# Altium PCB PWR_supply_sch.PcbDoc
Units mil, origin at the board's own origin, x right, y up, seen from the top; angles counter-clockwise.
Board outline 1895 x 1825 mil, 2 copper layers (Top Layer, Bottom Layer); 18 components, 8 nets, 40 pads, 4 vias.
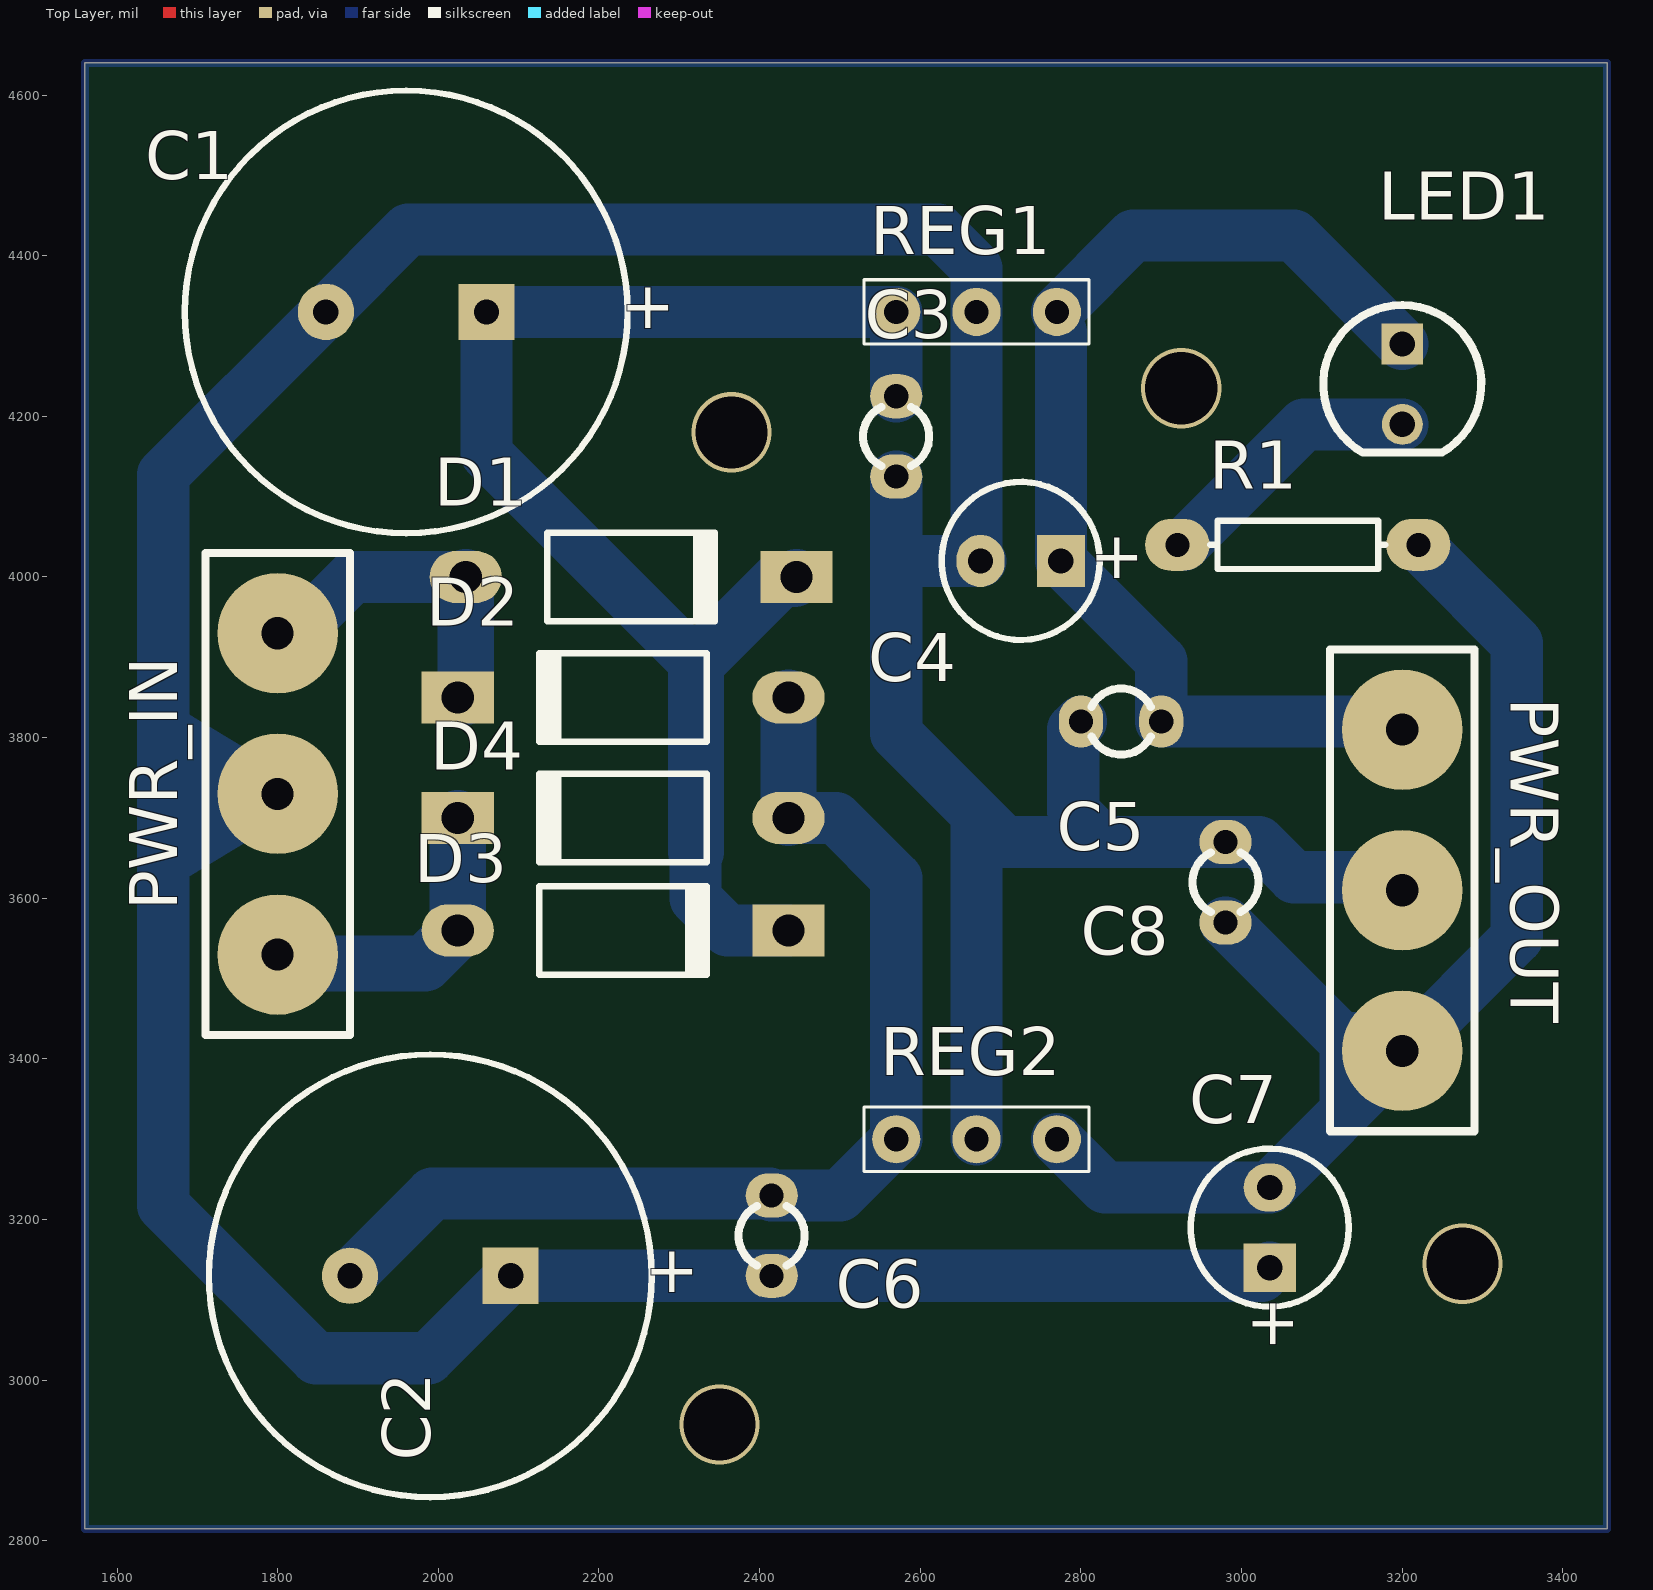
[diagram p0: Top Layer view]
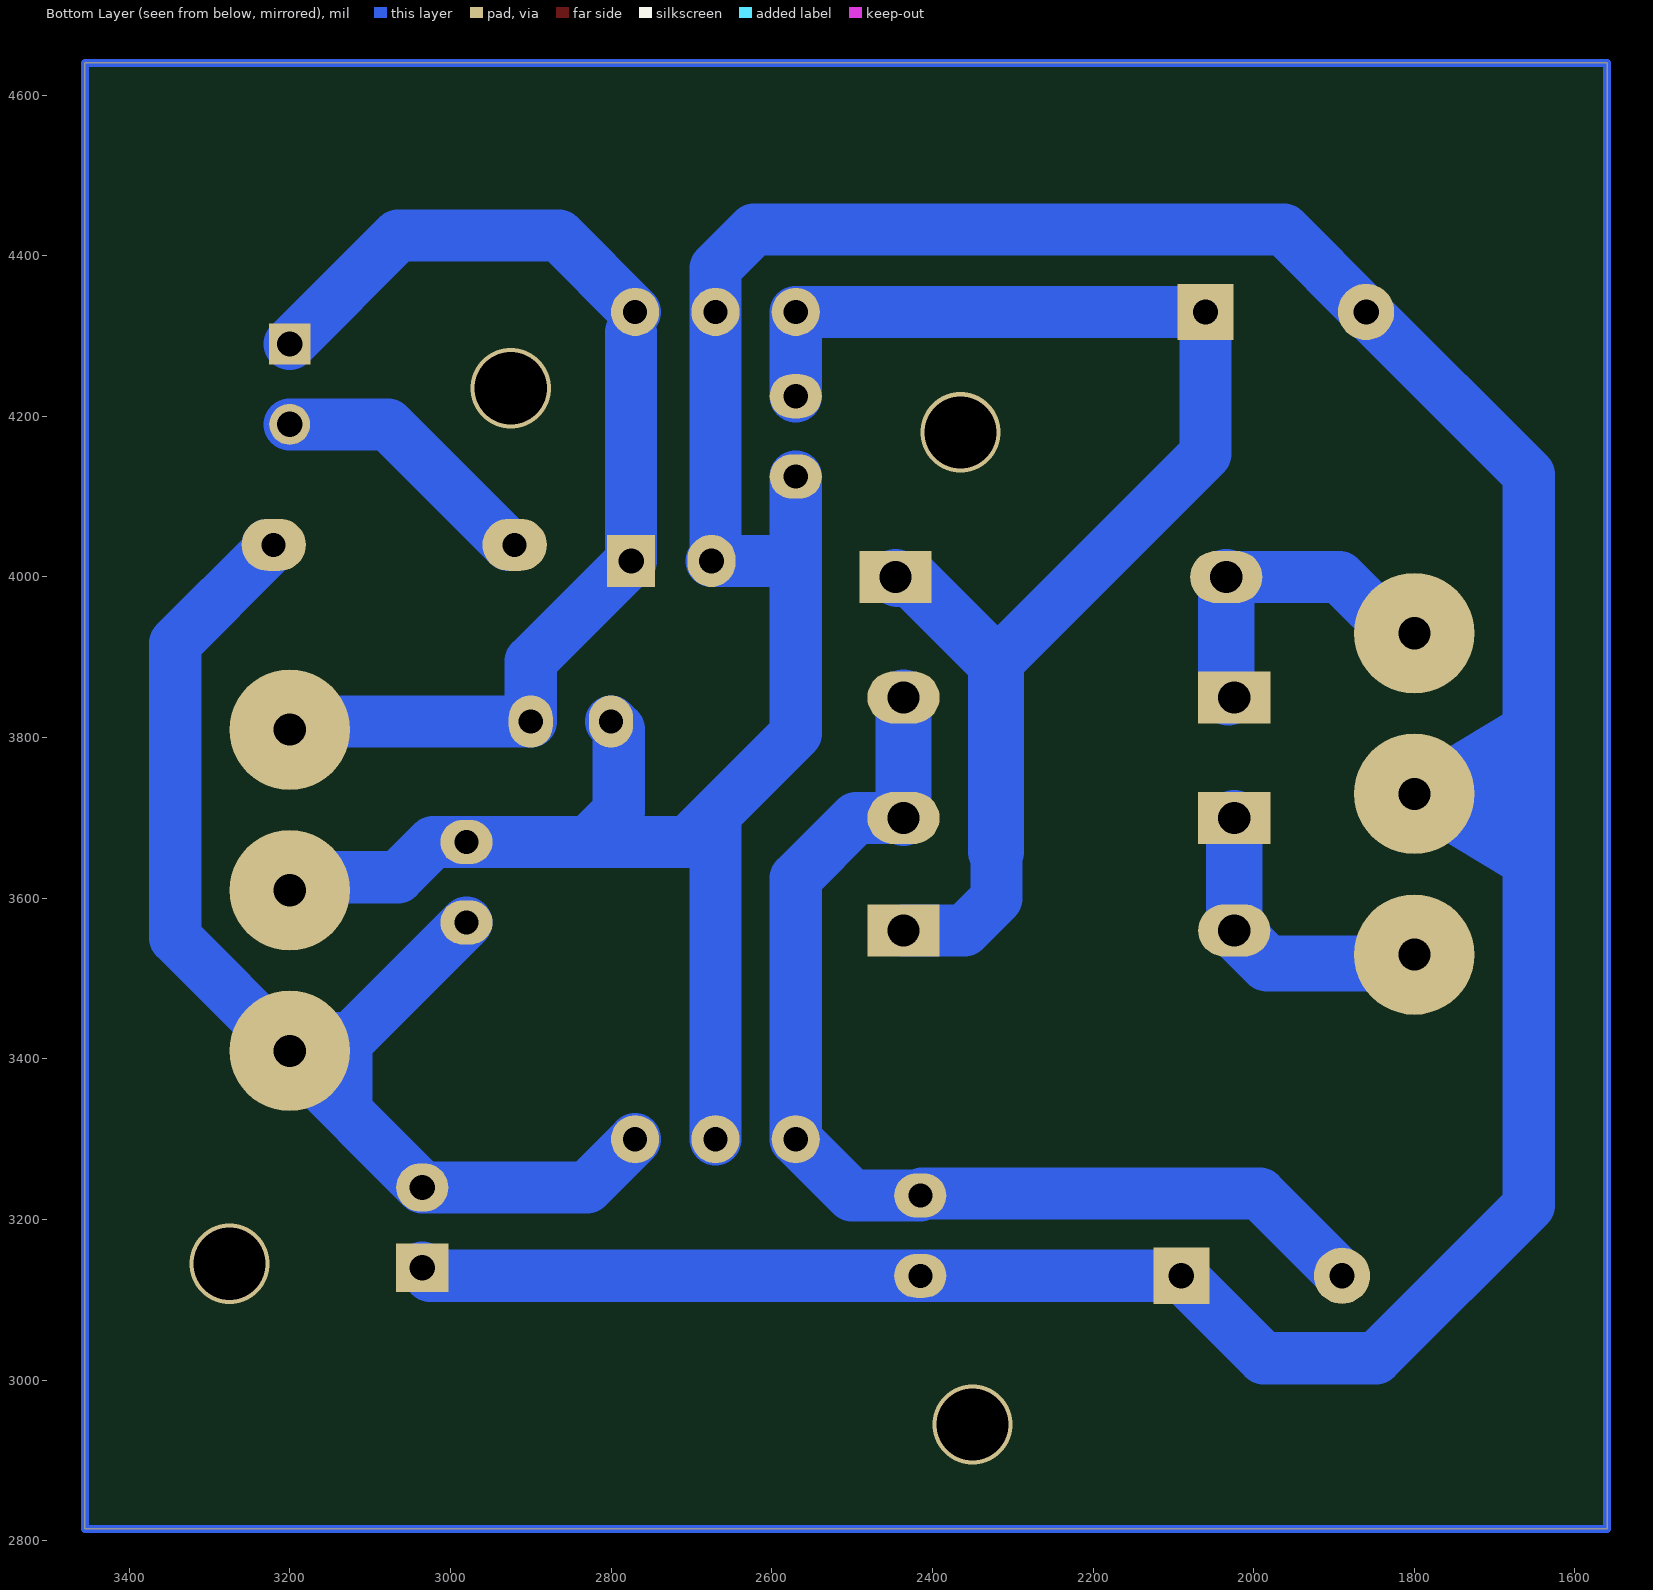
[diagram p1: Bottom Layer view, seen from below]
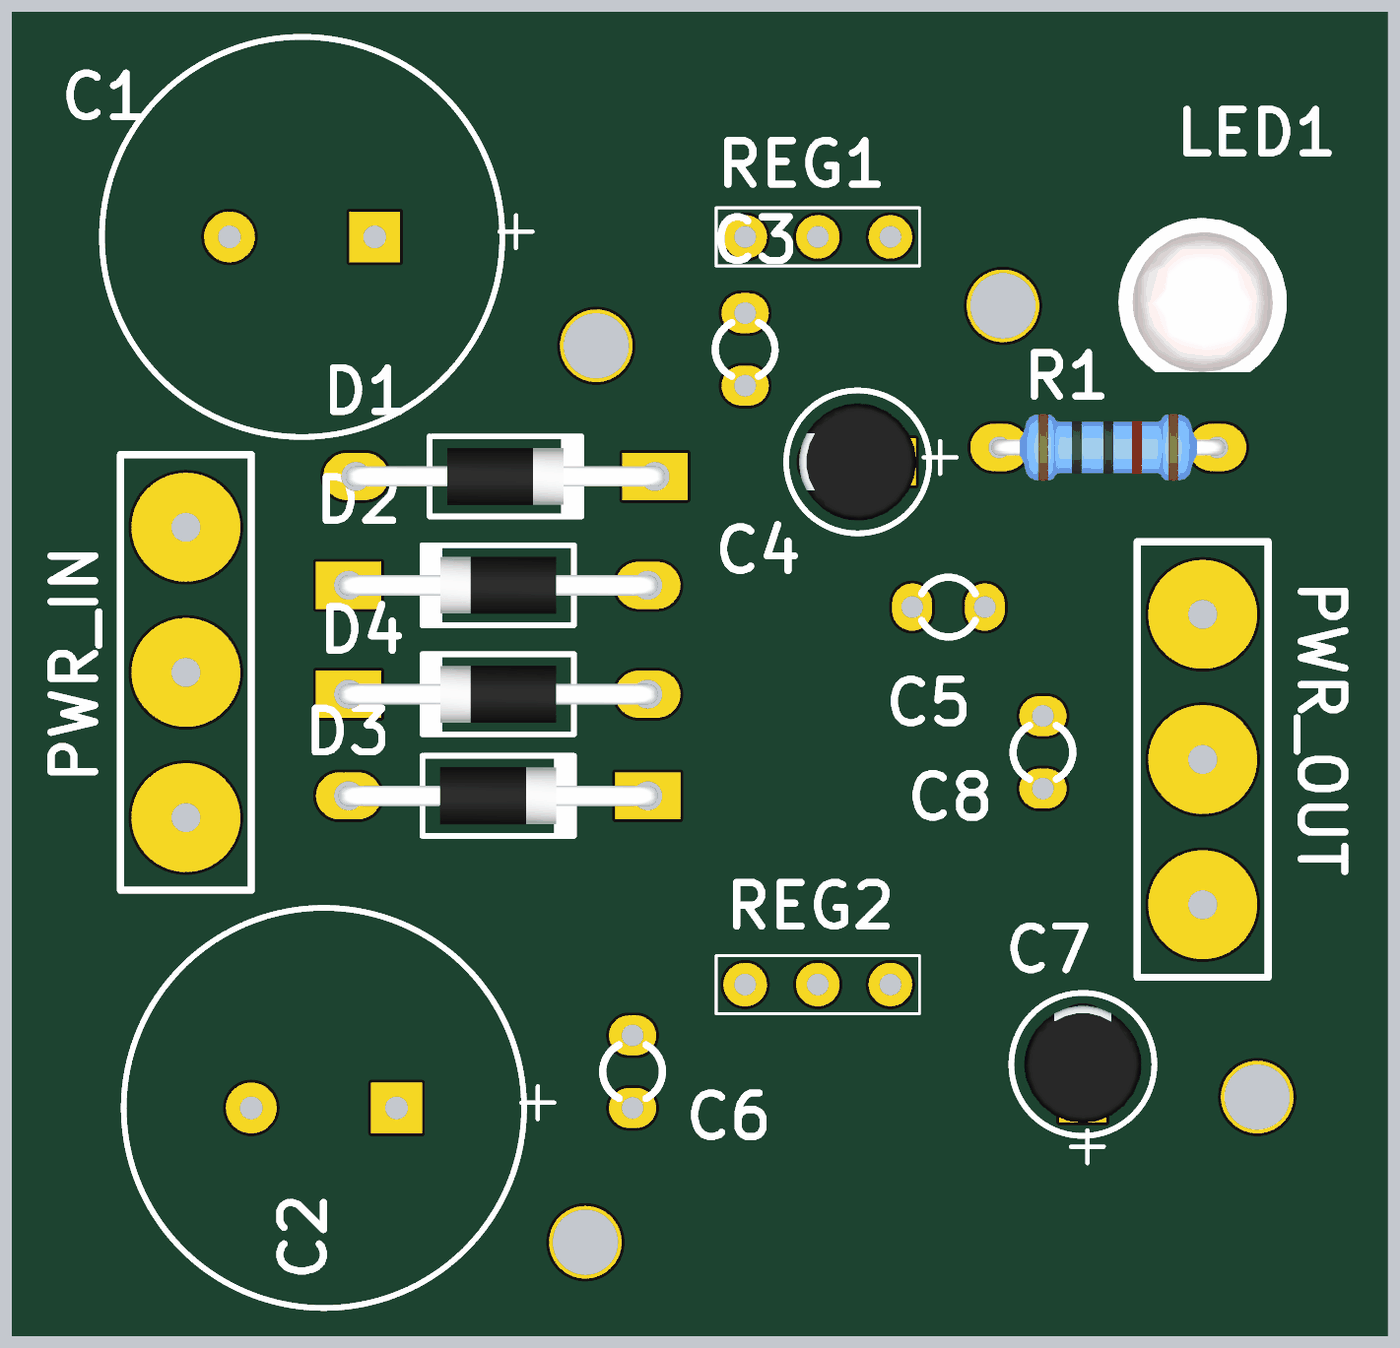
[diagram p2: 3D render of the assembled board from above, using the file's embedded part models]

## Layer stack, top to bottom
Top Solder: solder mask 0.4, Solder Resist, Dk 3.5
Top Layer: signal copper 1.4
Dielectric 1: dielectric 12.6, FR-4, Dk 4.8
Bottom Layer: signal copper 1.4
Bottom Solder: solder mask 0.4, Solder Resist, Dk 3.5

## Board outline
1560,2815 3455,2815 3455,4640 1560,4640

## Design rules (kind name [scope] priority, off if disabled: settings)
Clearance [All] p1: gap=35 ignorepadtopadclearanceinfootprint=FALSE except(0: Arc-Hole Track-Hole SMDPad-Hole THPad-Hole Via-Hole Fill-Hole Poly-Hole Region-Hole Text-Hole; 10: Arc-SMDPad Arc-Text Track-SMDPad Track-Text SMDPad-SMDPad SMDPad-Text THPad-Text Via-Text Fill-Text Poly-Text Region-Text Text-Text)
PolygonConnect [All] p1: connectstyle=Relief reliefconductorwidth=10 reliefentries=4 polygonreliefangle="90 Angle" airgapwidth=10
RoutingVias [All] p1: holewidth=28 width=50 viastyle="Through Hole" minholewidth=28 minwidth=50 maxholewidth=28 maxwidth=50
SolderMaskExpansion [All] p1: expansion=4 istentingtop=FALSE
Width [All] p1: maxlimit=70 minlimit=60 preferedwidth=65 minimp=50.000000 maximp=50.000000 favimp=50.000000
30 further rules are at their usual default settings.

## Classes and differential pairs
component class PWR_supply_sch: C1 C2 C3 C4 C5 C6 C7 C8 D1 D2 D3 D4 LED1 PWR_IN PWR_OUT REG1 REG2

## Components (designator, comment, footprint, x,y, rotation, side; value= is the part's Value field where it differs from the comment)
C1 "Cap1" CAP1_200mil 1960,4330 r180 top value=1mF
C2 "Cap1" CAP1_200mil 1990,3130 r180 top value=1mF
C3 "Cap3" CAP3 2570,4175 r90 top value=0.22uF
C4 "Cap1" CAP1 2725,4020 r180 top value=1mF
C5 "Cap3" CAP3 2850,3820 r0 top value=0.22uF
C6 "Cap3" CAP3 2415,3180 r270 top value=0.22uF
C7 "Cap1" CAP1 3035,3190 r90 top value=1mF
C8 "Cap3" CAP3 2980,3620 r90 top value=0.22uF
D1 "1N4007" 1N4007 2240,4000 r0 top
D2 "1N4007" 1N4007 2230,3850 r180 top
D3 "1N4007" 1N4007 2230,3560 r0 top
D4 "1N4007" 1N4007 2230,3700 r180 top
LED1 "LED" LED 3200,4240 r270 top
PWR_IN "PWR3" PWR3 1800,3730 r270 top
PWR_OUT "PWR3" PWR3 3200,3610 r270 top
R1 "Res1" RES 3070,4040 r180 top value=2.7k
REG1 "Regulator" Regulator#1 2570,4330 r0 top
REG2 "Regulator" Regulator#2 2570,3300 r0 top

## Footprints (in the part's own frame and the unit in brackets; to place one, negate y for a bottom-side part, rotate by r counter-clockwise, add the part's x,y. Pads: shape width x height; smd on the part's side, far side on the other; paste and mask are expansions set on the pad)
1N4007 [mil] "Diode, Axial; Body 5.2 x 2.7 mm (LxDia. max), Lead Dia. 0.86 mm (max)"
  oval 90x65 hole 40: 1(-205.91,0)
  rect 90x65 hole 40: 2(205.91,0)
  silkscreen extent -104,-55 108,55, body extent -220,-39 220,39, height 79
CAP1 [mil] "THD, 2-Leads, Dia 5mm, Body Length 11mm"
  rect 60x65 hole 31.5: 1(-50,0)
  oval 60x65 hole 31.5: 2(50,0)
  silkscreen extent -98,-98 98,98, body extent -81,-81 81,81, height 319
CAP1_200mil [mil] "THD, 2-Leads, Dia 5mm, Body Length 11mm"
  rect 70x70 hole 31.5: 1(-100,0)
  round 70 hole 31.5: 2(100,0)
  silkscreen extent -276,-276 276,276
CAP3 [mil] "THD, 2-Leads"
  oval 55x65 hole 30: 1(-50,0) 2(50,0)
  silkscreen extent -37,-41 37,41, body extent -92,-49 92,49, height 243
LED [mm] "5mm"
  rect 1.3x1.3 hole 0.8: 1(-1.27,0)
  round 1.295 hole 0.8: 2(1.27,0)
  silkscreen extent -2.5,-2.5 2.17,2.5, body extent -2.95,-2.95 2.45,2.95, height 9.2
PWR3 [mil]
  round 150 hole 40: 1(-200,0) 2(0,0) 3(200,0)
  silkscreen extent -300,-90 300,90
Regulator#1 [mil]
  round 60 hole 30: 1(0,0) 2(100,0) 3(200,0)
  silkscreen extent -40,-40 240,40
Regulator#2 [mil]
  round 60 hole 30: 2(100,0) 3(0,0) 3(200,0)
  silkscreen extent -40,-40 240,40
RES [mil] "Axial Device, Thru-Hole; 2 Leads; 0.3 in Pin Spacing"
  oval 80x65 hole 30: 1(-150,0) 2(150,0)
  silkscreen extent -109,-30 109,30, body extent -161,-46 161,46, height 96

## Part data
C1 C2 C3 C4 C5 C6 C7 C8: "Capacitor", PackageDescription="Capacitor; 2 Leads", PackageReference=CAPR5-4X5, Published=23-Sep-2002, Publisher="Altium Limited"
D1 D2 D3 D4: "1 Amp General Purpose Rectifier", Code_JEDEC=DO-204-AL, ComponentLink1Description="Manufacturer Link", ComponentLink1URL=http://www.fairchildsemi.com/, ComponentLink2Description=Datasheet, ComponentLink2URL=http://www.fairchildsemi.com/ds/1N%2F1N4001.pdf, DatasheetVersion=1998, LatestRevisionDate=17-Jul-2002, LatestRevisionNote="Re-released for DXP Platform.", PackageDescription="Diode, Axial; Body 5.2 x 2.7 mm (LxDia. max), Lead Dia. 0.86 mm (max)", PackageReference=DO-41, PackageVersion=Aug-1999, Published=8-Jun-2000, Publisher="Altium Limited"
R1: "Resistor", LatestRevisionDate=17-Jul-2002, LatestRevisionNote="Re-released for DXP Platform.", PackageDescription="Axial Device, Thru-Hole; 2 Leads; 0.3 in Pin Spacing", PackageReference=AXIAL-0.3, Published=8-Jun-2000, Publisher="Altium Limited"

## Via types
v1: diameter 100, hole 90, Top Layer to Bottom Layer, 4 vias

## Nets (pads, with @x,y where several pads share a name; then routed paths per layer and width w, separated by ;. In a path a pad name is that pad's centre, name@x,y a point inside that pad or via, vN(x,y) a via of type N, cw(c..) or ccw(c..) an arc to the next point about the centre after c; other vN are vias at no path point)
GND: C1.2 C2.1 C3.1 C4.2 C5.1 C6.2 C7.1 C8.2 PWR_IN.2 PWR_OUT.2 REG1.2 REG2.2 | length 5753.1
  Bottom Layer w65: PWR_IN.2 1662.5,3730 1657.5,3725 ; C3.1 2570,3805 2675,3700 2705,3670 2828.58,3670 ; 2600,4020 C4.2 2670,4025 REG1.2 2670,4384.42 2621.92,4432.5 1962.5,4432.5 C1.2 1657.5,4127.5 1657.5,3725 ; REG2.2 2670,3695 ; C5.1 2790.5,3810.5 2790.5,3708.08 2828.58,3670 ; C7.1 3025,3130 C6.2 C2.1 1987.5,3027.5 1847.54,3027.5 1657.5,3217.54 1657.5,3725 ; PWR_OUT.2 3183.74,3626.26 3065.16,3626.26 3021.42,3670 C8.2 2828.58,3670
NetC1_1: C1.1 C3.2 D1.2 D3.2 REG1.1 | length 1755.5
  Bottom Layer w65: 2320.91,3657.54 2320,3656.64 2320,3600 2360,3560 D3.2 ; 2320.91,3892.46 2060,4153.36 C1.1 REG1.1 C3.2
  Bottom Layer w70: 2320.91,3657.54 2320.91,3892.46 2425.95,3997.5 2443.41,3997.5 D1.2
NetC2_2: C2.2 C6.1 D2.1 D4.1 REG2.3@2570,3300 | length 1392.6
  Bottom Layer w65: C2.2 1992.5,3232.5 2412.5,3232.5 C6.1 2500,3230 2570,3300 2570,3625 2495,3700 D4.1
  Bottom Layer w70: D4.1 D2.1
NetC4_1: C4.1 C5.2 LED1.1 PWR_OUT.1 REG1.3 | length 1366.2
  Bottom Layer w65: REG1.3 2865,4425 3065,4425 LED1.1 ; REG1.3@2775,4305 C4.1 2900,3895 C5.2 3190,3820 PWR_OUT.1
NetC7_2: C7.2 C8.1 PWR_OUT.3 R1.1 REG2.3@2770,3300 | length 1560.4
  Top Layer w65: PWR_OUT.3 PWR_OUT.3@3201.53,3410
  Bottom Layer w65: REG2.3@2770,3300 2830,3240 C7.2 ; C8.1 3123.74,3426.26 3183.74,3426.26 PWR_OUT.3@3200.72,3409.28 ; C7.2@3035,3240.08 3199.2,3404.28 PWR_OUT.3@3199.2,3409.2 ; PWR_OUT.3@3200.8,3409.28 3342.5,3550.97 3342.5,3917.5 3227.5,4032.5 3227.5,4040 R1.1
NetD1_1: D1.1 D2.2 PWR_IN.1 | length 417.7
  Bottom Layer w65: PWR_IN.1 1823,3930 1893,4000 D1.1
  Bottom Layer w70: D2.2@2029.09,3852.5 2031.59,3850 2034.09,3852.5 D1.1
NetD3_1: D3.1 D4.2 PWR_IN.3 | length 385.6
  Bottom Layer w70: PWR_IN.3 1811.01,3518.99 1983.09,3518.99 D3.1 D4.2
NetLED1_2: LED1.2 R1.2 | length 342.1
  Bottom Layer w65: R1.2 2927.5,4040 3077.5,4190 LED1.2
copper on no net: | length 7440
  Bottom Layer w10: 1560,2815 1560,4640 3455,4640 3455,2815 1560,2815
  other v1: 2350,2945 3275,3145 2365,4180 2925,4235

## Other copper
Bottom Layer:
  region net NetC7_2: 3097.5,3417.5 3097.5,3330 3190,3370 3120,3440
  region net GND: 1685,3624.06 1685,3700 1810.94,3700
  region net GND: 1685,3775.94 1685,3700 1810.94,3700
  region net GND: 1680,3835 1680,3759.06 1805.94,3759.06

## Text inside footprints (layer, text, board x,y; h text height)
C1: Top Overlay "+" at 2295,4360 h59.06 r180
C2: Top Overlay "+" at 2325,3160 h59.06 r180
C4: Top Overlay "+" at 2878.86,4049.02 h59.06 r180
C7: Top Overlay "+" at 3064.02,3036.14 h59.06 r90